# Altium PCB inversor_rev4.PcbDoc
Units mil, origin at the board's own origin, x right, y up, seen from the top; angles counter-clockwise.
Board outline 3939.96 x 3929 mil, 2 copper layers (Top Layer, Bottom Layer); 101 components, 66 nets, 312 pads, 278 vias.
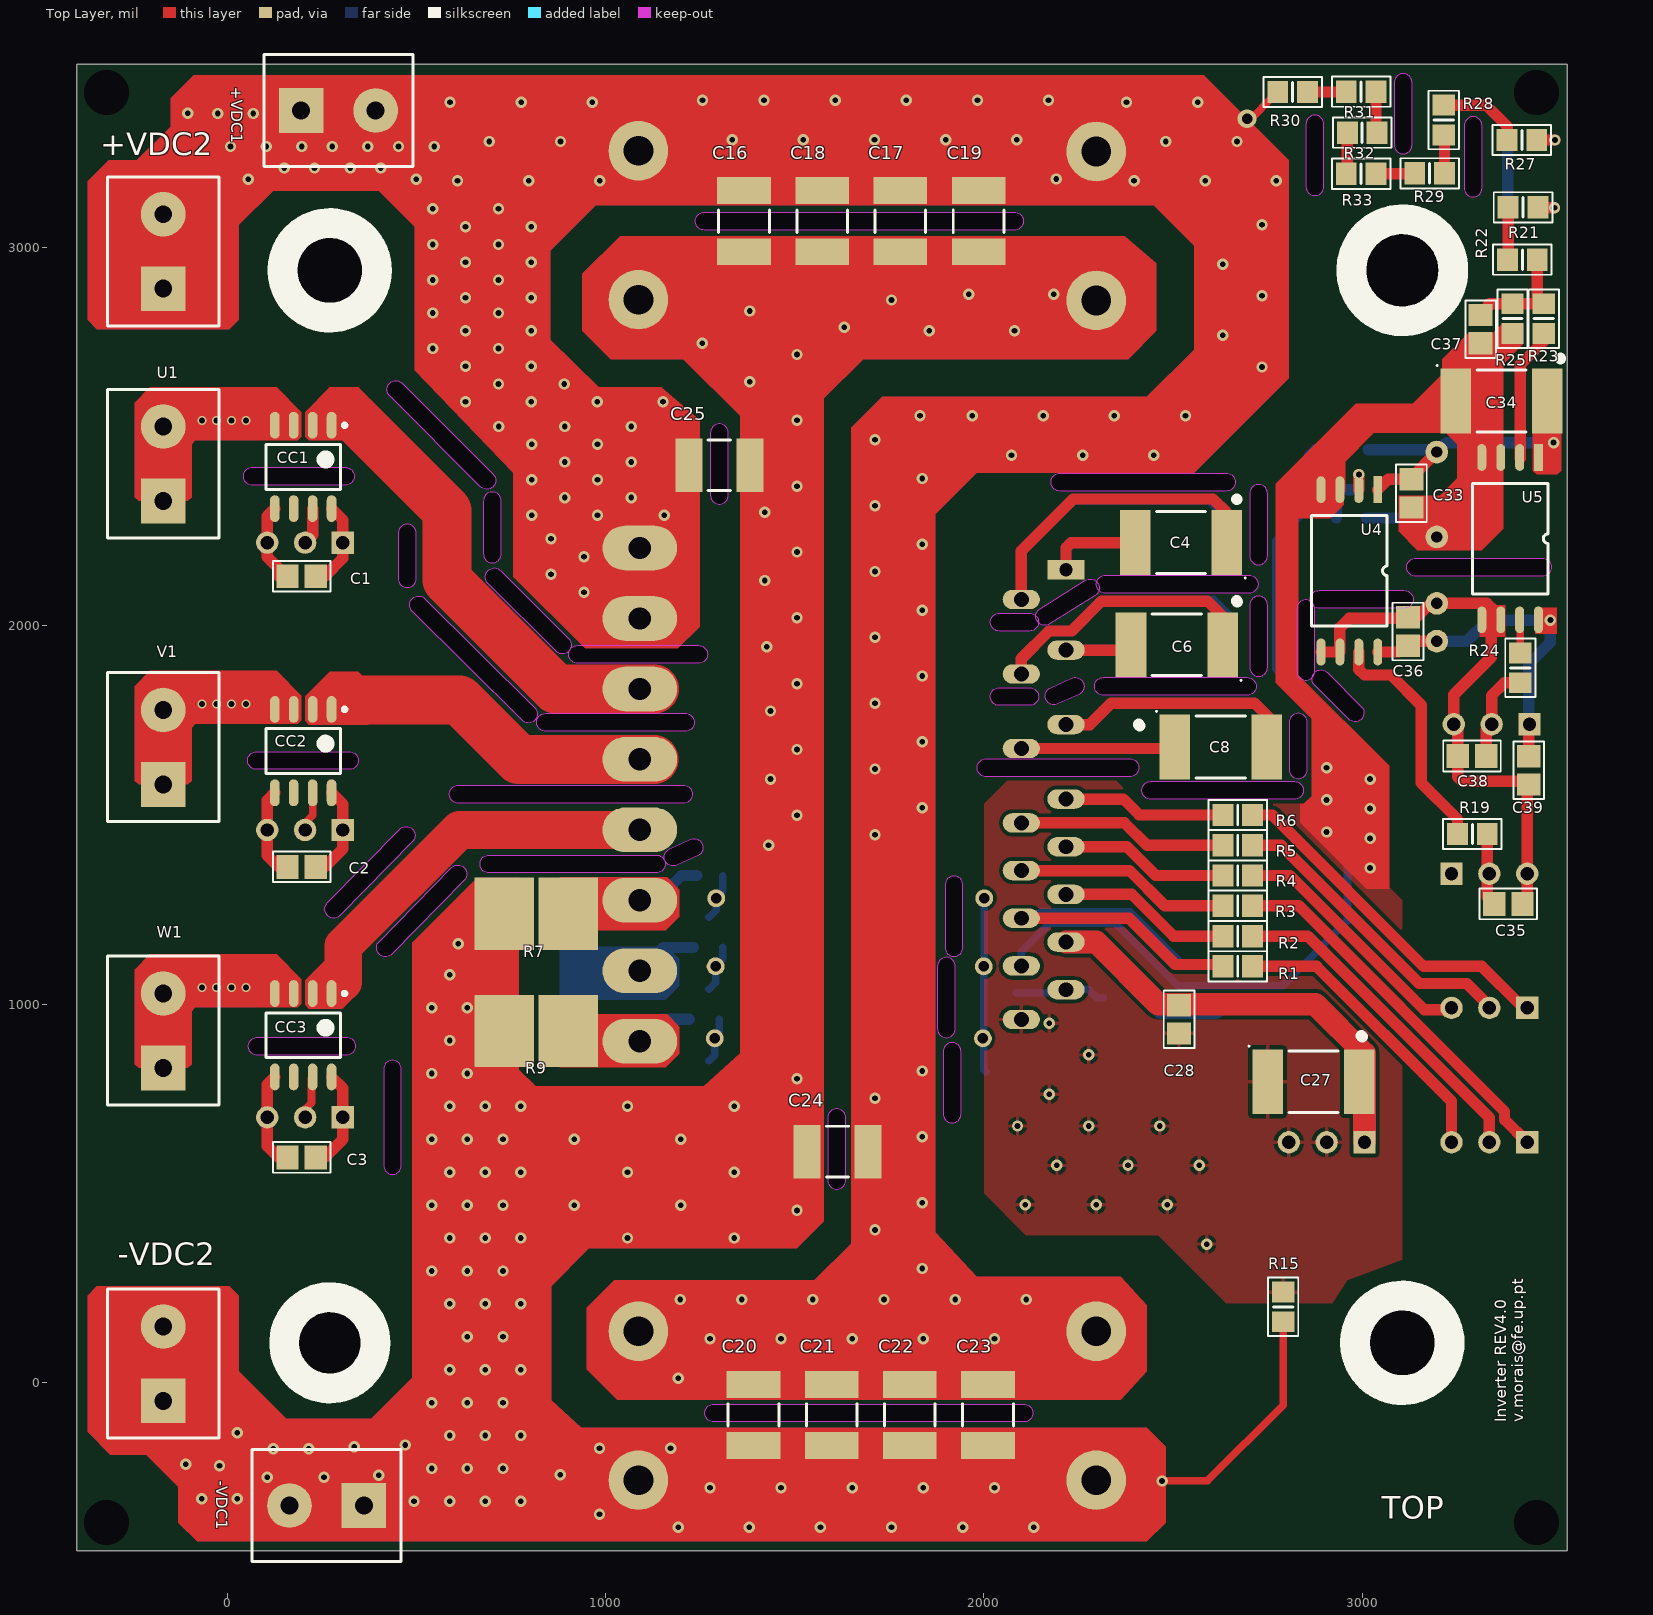
[diagram p0: Top Layer view]
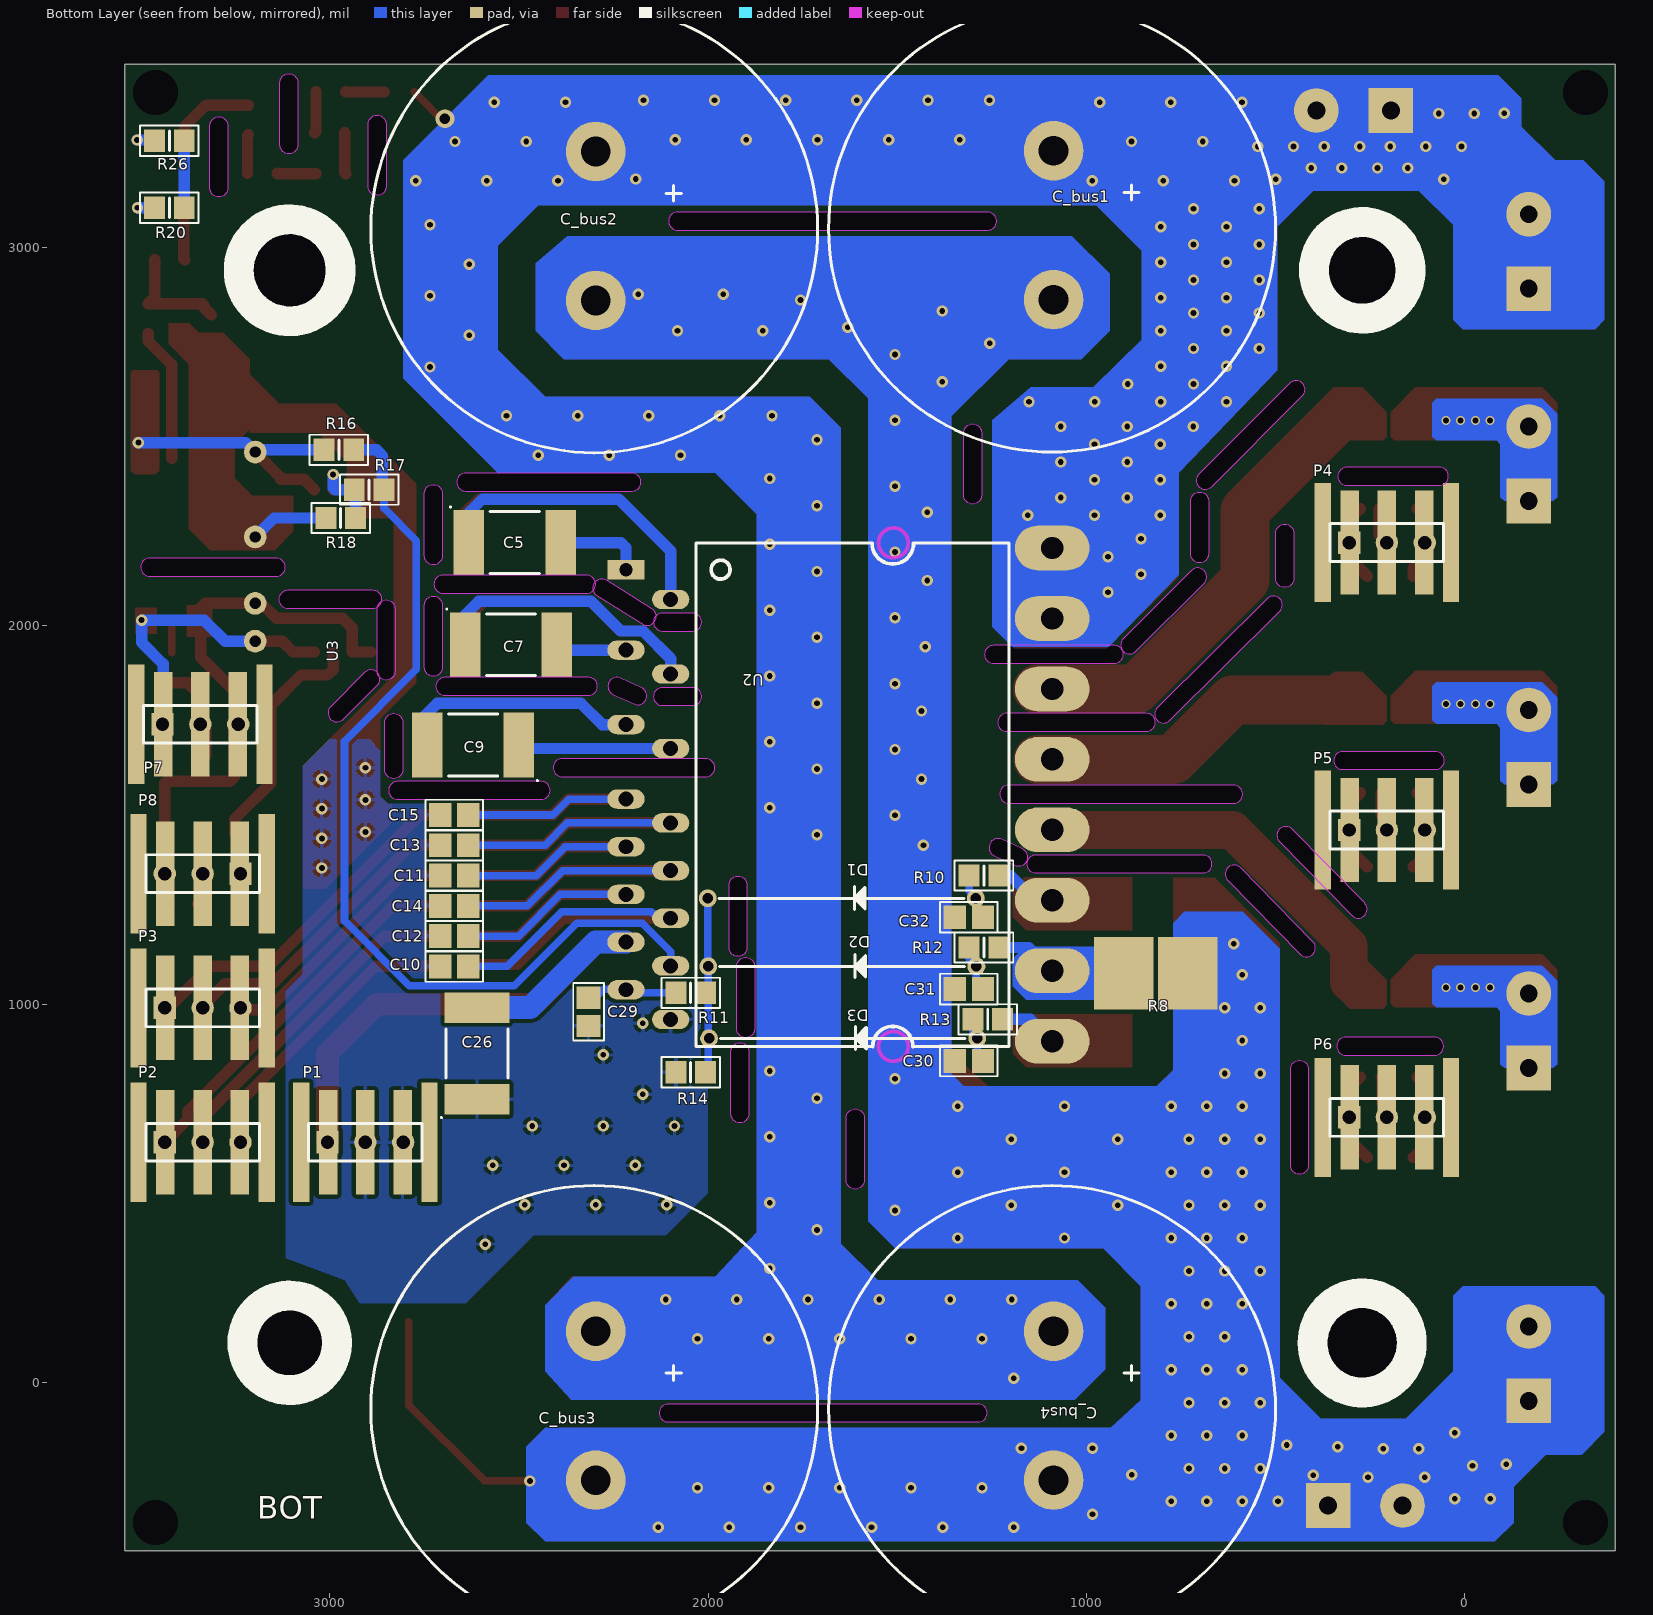
[diagram p1: Bottom Layer view, seen from below]

## Layer stack, top to bottom
Top Solder: solder mask 0.4, Solder Resist, Dk 3.5
Top Layer: signal copper 1.4
Dielectric 1: dielectric 12.6, FR-4, Dk 4.8
Bottom Layer: signal copper 1.4
Bottom Solder: solder mask 0.4, Solder Resist, Dk 3.5

## Board outline
-397.74,-445 3542.22,-445 3542.22,3484 -397.74,3484
cut-out: 2964.29,1753.29 2874.29,1843.29 cw(c2891,1860) 2907.71,1876.71 2997.71,1786.71 cw(c2981,1770) 3004.64,1770 cw(c2981,1770)
cut-out: 2827.36,1880 ccw(c2851,1880) 2874.64,1880 2874.64,2045 ccw(c2851,2045) 2827.36,2045
cut-out: 2886,2046.36 cw(c2886,2070) 2886,2093.64 3111,2093.64 cw(c3111,2070) 3134.64,2070 cw(c3111,2070) 3111,2046.36
cut-out: 3141,2131.36 cw(c3141,2155) 3141,2178.64 3476,2178.64 cw(c3476,2155) 3499.64,2155 cw(c3476,2155) 3476,2131.36
cut-out: 3269.36,3157 ccw(c3293,3157) 3316.64,3157 3316.64,3322 ccw(c3293,3322) 3269.36,3322
cut-out: 3084.36,3271 ccw(c3108,3271) 3131.64,3271 3131.64,3436 ccw(c3108,3436) 3084.36,3436
cut-out: 2851.36,3161 ccw(c2875,3161) 2898.64,3161 2898.64,3326 ccw(c2875,3326) 2851.36,3326
cut-out: 2201,2356.36 cw(c2201,2380) 2201,2403.64 2641,2403.64 cw(c2641,2380) 2664.64,2380 cw(c2641,2380) 2641,2356.36
cut-out: 2702.36,2185 ccw(c2726,2185) 2749.64,2185 2749.64,2350 ccw(c2726,2350) 2702.36,2350
cut-out: 2702.36,1890 ccw(c2726,1890) 2749.64,1890 2749.64,2055 ccw(c2726,2055) 2702.36,2055
cut-out: 2321,2086.36 cw(c2321,2110) 2321,2133.64 2701,2133.64 cw(c2701,2110) 2724.64,2110 cw(c2701,2110) 2701,2086.36
cut-out: 2173.53,2004.96 cw(c2161,2025) 2148.47,2045.04 2268.47,2120.04 cw(c2281,2100) 2304.64,2100 cw(c2281,2100) 2293.53,2079.96
cut-out: 2041,1986.36 cw(c2041,2010) 2041,2033.64 2121,2033.64 cw(c2121,2010) 2144.64,2010 cw(c2121,2010) 2121,1986.36
cut-out: 2041,1789.51 cw(c2041,1813.15) 2041,1836.79 2121,1836.79 cw(c2121,1813.15) 2144.64,1813.15 cw(c2121,1813.15) 2121,1789.51
cut-out: 2195.78,1793.48 cw(c2186,1815) 2176.22,1836.52 2231.22,1861.52 cw(c2241,1840) 2264.64,1840 cw(c2241,1840) 2250.78,1818.48
cut-out: 2316,1816.36 cw(c2316,1840) 2316,1863.64 2696,1863.64 cw(c2696,1840) 2719.64,1840 cw(c2696,1840) 2696,1816.36
cut-out: 2807.36,1620 ccw(c2831,1620) 2854.64,1620 2854.64,1745 ccw(c2831,1745) 2807.36,1745
cut-out: 2441,1541.36 cw(c2441,1565) 2441,1588.64 2821,1588.64 cw(c2821,1565) 2844.64,1565 cw(c2821,1565) 2821,1541.36
cut-out: 2006,1601.36 cw(c2006,1625) 2006,1648.64 2386,1648.64 cw(c2386,1625) 2409.64,1625 cw(c2386,1625) 2386,1601.36
cut-out: 1286,-104.11 cw(c1286,-80.47) 1286,-56.84 2106,-56.84 cw(c2106,-80.47) 2129.64,-80.47 cw(c2106,-80.47) 2106,-104.11
cut-out: 1892.36,710 ccw(c1916,710) 1939.64,710 1939.64,875 ccw(c1916,875) 1892.36,875
cut-out: 1877.36,935 ccw(c1901,935) 1924.64,935 1924.64,1100 ccw(c1901,1100) 1877.36,1100
cut-out: 1897.36,1150 ccw(c1921,1150) 1944.64,1150 1944.64,1315 ccw(c1921,1315) 1897.36,1315
cut-out: 1587.36,535 ccw(c1611,535) 1634.64,535 1634.64,700 ccw(c1611,700) 1587.36,700
cut-out: 1261,3045.89 cw(c1261,3069.53) 1261,3093.16 2081,3093.16 cw(c2081,3069.53) 2104.64,3069.53 cw(c2081,3069.53) 2081,3045.89
cut-out: 1277.36,2345 ccw(c1301,2345) 1324.64,2345 1324.64,2510 ccw(c1301,2510) 1277.36,2510
cut-out: 66.99,2371.68 cw(c66.99,2395.32) 66.99,2418.95 311.99,2418.95 cw(c311.99,2395.32) 335.62,2395.32 cw(c311.99,2395.32) 311.99,2371.68
cut-out: 669.29,2367.81 429.29,2607.81 cw(c446,2624.53) 462.71,2641.24 702.71,2401.24 cw(c686,2384.53) 709.64,2384.53 cw(c686,2384.53)
cut-out: 677.36,2190 ccw(c701,2190) 724.64,2190 724.64,2330 ccw(c701,2330) 677.36,2330
cut-out: 869.29,1932.81 689.29,2112.81 cw(c706,2129.53) 722.71,2146.24 902.71,1966.24 cw(c886,1949.53) 909.64,1949.53 cw(c886,1949.53)
cut-out: 926,1900.89 cw(c926,1924.53) 926,1948.16 1246,1948.16 cw(c1246,1924.53) 1269.64,1924.53 cw(c1246,1924.53) 1246,1900.89
cut-out: 452.36,2125 ccw(c476,2125) 499.64,2125 499.64,2245 ccw(c476,2245) 452.36,2245
cut-out: 779.77,1749.94 489.35,2038.22 cw(c506,2055) 522.65,2071.78 813.08,1783.49 cw(c796.43,1766.72) 820.06,1766.72 cw(c796.43,1766.72)
cut-out: 841.43,1721.36 cw(c841.43,1745) 841.43,1768.64 1211,1768.64 cw(c1211,1745) 1234.64,1745 cw(c1211,1745) 1211,1721.36
cut-out: 78,1620.36 cw(c78,1644) 78,1667.64 323,1667.64 cw(c323,1644) 346.64,1644 cw(c323,1644) 323,1620.36
cut-out: 611,1531.36 cw(c611,1555) 611,1578.64 1206,1578.64 cw(c1206,1555) 1229.64,1555 cw(c1206,1555) 1206,1531.36
cut-out: 691.89,1347 cw(c691.89,1370.64) 691.89,1394.27 1134.11,1394.27 cw(c1134.11,1370.64) 1157.75,1370.64 cw(c1134.11,1370.64) 1134.11,1347
cut-out: 435.5,1132.5 cw(c418.61,1149.04) 401.73,1165.58 592.73,1360.58 cw(c609.61,1344.04) 633.25,1344.04 cw(c609.61,1344.04) 626.5,1327.5
cut-out: 298.89,1234.46 cw(c282,1251) 265.11,1267.54 456.11,1462.54 cw(c473,1446) 496.64,1446 cw(c473,1446) 489.89,1429.46
cut-out: 80,865.36 cw(c80,889) 80,912.64 315,912.64 cw(c315,889) 338.64,889 cw(c315,889) 315,865.36
cut-out: 413.36,574 ccw(c437,574) 460.64,574 460.64,828 ccw(c437,828) 413.36,828
cut-out: 1188.78,1367.48 cw(c1179,1389) 1169.22,1410.52 1224.22,1435.52 cw(c1234,1414) 1257.64,1414 cw(c1234,1414) 1243.78,1392.48

## Design rules (kind name [scope] priority, off if disabled: settings)
Clearance [All] p1: gap=10 ignorepadtopadclearanceinfootprint=FALSE
Height [All] p1: minheight=0 maxheight=10000 prefheight=500
HoleSize [All] p1: absolutevalues=TRUE maxlimit=1000 minlimit=1 maxpercent=80.000 minpercent=20.000
PlaneClearance [All] p1: clearance=100
PolygonConnect [All] p1: connectstyle=Relief reliefconductorwidth=10 reliefentries=4 polygonreliefangle="90 Angle" airgapwidth=10
RoomDefinition inversor_rev4 [InComponentClass('inversor_rev4')] p1: confinementstyle=ConfineIn formatcopy=TRUE lockcomponents=FALSE outline -2036.05,-3776.5 -36.05,-3776.5 -36.05,-2776.5 -2036.05,-2776.5
RoutingVias [All] p1: holewidth=28 width=50 viastyle="Through Hole" minholewidth=28 minwidth=50 maxholewidth=28 maxwidth=50
SilkToSilkClearance [All] p1: silktosilkclearance=1
SilkToSolderMaskClearance [IsPad] p1: minsilkscreentomaskgap=1 clearancetoexposedcopper=TRUE
SolderMaskExpansion [All] p1: expansion=4
Width [All] p1: maxlimit=150 minlimit=10 preferedwidth=30
25 further rules are at their usual default settings.

## Components (designator, comment, footprint, x,y, rotation, side; value= is the part's Value field where it differs from the comment)
+VDC1 "P 2p 5mm" connector1x2_parafuso 294,3362 r0 top
+VDC2 "P 2p 5mm" connector1x2_parafuso -169,2989.53 r90 top
-VDC1 "P 2p 5mm" connector1x2_parafuso 263,-325 r180 top
-VDC2 "P 2p 5mm" connector1x2_parafuso -169,50 r90 top
C1 "C 10uF 0805 MLCC 25V X5R" CAPC_0805 197,2131 r0 top
C2 "C 10uF 0805 MLCC 25V X5R" CAPC_0805 197,1363 r0 top
C3 "C 10uF 0805 MLCC 25V X5R" CAPC_0805 197,595 r0 top
C4 "C 10uF 2917 TANT 50V" CAPC_2917 2521,2220 r180 top
C5 "C 10uF 2917 TANT 50V" CAPC_2917 2511,2220 r180 bottom
C6 "C 10uF 2917 TANT 50V" CAPC_2917 2509.94,1950 r180 top
C7 "C 10uF 2917 TANT 50V" CAPC_2917 2521,1950 r180 bottom
C8 "C 10uF 2917 TANT 50V" CAPC_2917 2626,1680 r0 top
C9 "C 10uF 2917 TANT 50V" CAPC_2917 2621,1685 r0 bottom
C10 "C 1nF 0805 MLCC 50V X7R" CAPC_0805 2671,1100 r180 bottom
C11 "C 1nF 0805 MLCC 50V X7R" CAPC_0805 2671,1340 r180 bottom
C12 "C 1nF 0805 MLCC 50V X7R" CAPC_0805 2671,1180 r180 bottom
C13 "C 1nF 0805 MLCC 50V X7R" CAPC_0805 2671,1420 r180 bottom
C14 "C 1nF 0805 MLCC 50V X7R" CAPC_0805 2671,1260 r180 bottom
C15 "C 1nF 0805 MLCC 50V X7R" CAPC_0805 2671,1500 r180 bottom
C16 "C 100nF MLCC 1812 X7R 1kV" CAPC_1812 1366,3069.53 r90 top
C17 "C 100nF MLCC 1812 X7R 1kV" CAPC_1812 1779.33,3069.53 r90 top
C18 "C 100nF MLCC 1812 X7R 1kV" CAPC_1812 1572.67,3069.53 r90 top
C19 "C 100nF MLCC 1812 X7R 1kV" CAPC_1812 1986,3069.53 r90 top
C20 "C 100nF MLCC 1812 X7R 1kV" CAPC_1812 1391,-85.47 r90 top
C21 "C 100nF MLCC 1812 X7R 1kV" CAPC_1812 1597.67,-85.47 r90 top
C22 "C 100nF MLCC 1812 X7R 1kV" CAPC_1812 1804.33,-85.47 r90 top
C23 "C 100nF MLCC 1812 X7R 1kV" CAPC_1812 2011,-85.47 r90 top
C24 "C 100nF MLCC 1812 X7R 1kV" CAPC_1812 1613,610.53 r0 top
C25 "C 100nF MLCC 1812 X7R 1kV" CAPC_1812 1301,2424.53 r180 top
C26 "C 10uF 2917 TANT 50V" CAPC_2917 2611,870 r90 bottom
C27 "C 10uF 2917 TANT 50V" CAPC_2917 2871,795 r0 top
C28 "C 10uF 0805 MLCC 25V X5R" CAPC_0805 2516,960 r90 top
C29 "C 10nF 0805 MLCC 50V X7R" CAPC_0805 2316,980 r90 bottom
C30 "C 10nF 0805 MLCC 50V X7R" CAPC_0805 1311,850 r180 bottom
C31 "C 10nF 0805 MLCC 50V X7R" CAPC_0805 1311,1040 r180 bottom
C32 "C 10nF 0805 MLCC 50V X7R" CAPC_0805 1311,1230 r180 bottom
C33 "C 10uF 0805 MLCC 25V X5R" CAPC_0805 3130,2350 r90 top
C34 "C 10uF 2917 TANT 50V" CAPC_2917 3368,2594 r0 top
C35 "C1uF 0805 MLCC 50V X5R" CAPC_0805 3386,1265 r180 top
C36 "C 10uF 0805 MLCC 25V X5R" CAPC_0805 3121,1985 r270 top
C37 "C1uF 0805 MLCC 50V X5R" CAPC_0805 3313,2784 r90 top
C38 "C1uF 0805 MLCC 50V X5R" CAPC_0805 3290,1656 r0 top
C39 "C 10uF 0805 MLCC 25V X5R" CAPC_0805 3440,1618 r90 top
C_bus1 "C 470uF EleCap TH 450V" Capacitor_DCBUS 881,2850 r90 bottom
C_bus2 "C 470uF EleCap TH 450V" Capacitor_DCBUS 2091,2848 r90 bottom
C_bus3 "C 470uF EleCap TH 450V" Capacitor_DCBUS 2091,-270 r90 bottom
C_bus4 "C 470uF EleCap TH 450V" Capacitor_DCBUS 881,-270 r90 bottom
CC1 "IC CC 30A SO-8" CC6303_SOP8 201,2420 r270 top
CC2 "IC CC 30A SO-8" CC6303_SOP8 201,1669 r270 top
CC3 "IC CC 30A SO-8" CC6303_SOP8 201,918 r270 top
D1 "IC DIO generic" Diode_th 1292.34,1280 r0 bottom
D2 "IC DIO generic" Diode_th 1291,1100 r0 bottom
D3 "IC DIO generic" Diode_th 1288.87,909.78 r0 bottom
P1 "P 8p 2.54 SR DW 3P" MOLEX_3p_105431_1103 2906,635 r180 bottom
P2 "P 8p 2.54 SR DW 3P" MOLEX_3p_105431_1103 3336,635 r180 bottom
P3 "P 8p 2.54 SR DW 3P" MOLEX_3p_105431_1103 3336,990.41 r180 bottom
P4 "P 8p 2.54 SR DW 3P" MOLEX_3p_105431_1103 206,2220 r180 bottom
P5 "P 8p 2.54 SR DW 3P" MOLEX_3p_105431_1103 206,1460.5 r180 bottom
P6 "P 8p 2.54 SR DW 3P" MOLEX_3p_105431_1103 206,701 r180 bottom
P7 "P 8p 2.54 SR DW 3P" MOLEX_3p_105431_1103 3342,1740 r180 bottom
P8 "P 8p 2.54 SR DW 3P" MOLEX_3p_105431_1103 3336,1345 r0 bottom
R1 "R 100 1/8W 0805 1%" RESC_0805 2671,1100 r0 top
R2 "R 100 1/8W 0805 1%" RESC_0805 2671,1180 r0 top
R3 "R 100 1/8W 0805 1%" RESC_0805 2671,1260 r0 top
R4 "R 100 1/8W 0805 1%" RESC_0805 2671,1340 r0 top
R5 "R 100 1/8W 0805 1%" RESC_0805 2671,1420 r0 top
R6 "R 100 1/8W 0805 1%" RESC_0805 2671,1500 r0 top
R7 "R 0040 10W 7146 1%" RESC7247X15N 817,1239 r180 top
R8 "R 0040 10W 7146 1%" RESC7247X15N 817,1082 r180 bottom
R9 "R 0040 10W 7146 1%" RESC7247X15N 817,929 r180 top
R10 "R 100 1/8W 0805 1%" RESC_0805 1271,1340 r0 bottom
R11 "R 1k8 1/8W 0805 1%" RESC_0805 2046,1030 r0 bottom
R12 "R 100 1/8W 0805 1%" RESC_0805 1271,1150 r0 bottom
R13 "R 100 1/8W 0805 1%" RESC_0805 1261,960 r0 bottom
R14 "R 3K 1/8W 0805 1%" RESC_0805 2046,820 r180 bottom
R15 "R 0 1/8W 0805" RESC_0805 2791,200 r270 top
R16 "R 3k6 1/8W 0805 1%" RESC_0805 2976,2465 r180 bottom
R17 "R 49k9 1/8W 0805 1%" RESC_0805 2896,2360 r0 bottom
R18 "R 49k9 1/8W 0805 1%" RESC_0805 2971,2285 r180 bottom
R19 "R 330 1/8 0805 1%" RESC_0805 3291,1450 r0 top
R20 "R 30k 1/8W 0805 1%" RESC_0805 3424,3105 r0 bottom
R21 "R 30k 1/8W 0805 1%" RESC_0805 3425,3106 r180 top
R22 "R 30k 1/8W 0805 1%" RESC_0805 3423,2968 r0 top
R23 "R 30k 1/8W 0805 1%" RESC_0805 3480,2812 r270 top
R24 "R 330 1/8 0805 1%" RESC_0805 3418,1889 r270 top
R25 "R 150R 1/8W 0805 1%" RESC_0805 3397,2812 r90 top
R26 "R 30k 1/8W 0805 1%" RESC_0805 3424,3282 r0 bottom
R27 "R 30k 1/8W 0805 1%" RESC_0805 3422,3284 r180 top
R28 "R 30k 1/8W 0805 1%" RESC_0805 3215.4,3336.9 r270 top
R29 "R 30k 1/8W 0805 1%" RESC_0805 3178,3196 r180 top
R30 "R 30k 1/8W 0805 1%" RESC_0805 2816,3411 r0 top
R31 "R 30k 1/8W 0805 1%" RESC_0805 2997,3412 r0 top
R32 "R 30k 1/8W 0805 1%" RESC_0805 3000,3303.5 r180 top
R33 "R 30k 1/8W 0805 1%" RESC_0805 2997,3195 r0 top
U1 "P 2p 5mm" connector1x2_parafuso -169,2428.43 r90 top
U2 "IC IGBT IPM  IKCM30F60GA" ikcm30f60ga 2216.99,2148.44 r180 bottom
U3 "IC CC/CC 1W 5V" DC/DC_ISO 3197,1959.41 r90 bottom
U4 "IC AmpIso UNI AMC1311" "AMC1311 - SOIC8" 3041,2360 r270 top
U5 "IC AmpIso UNI AMC1311" "AMC1311 - SOIC8" 3466,2445 r270 top
V1 "P 2p 5mm" connector1x2_parafuso -169,1679.21 r90 top
W1 "P 2p 5mm" connector1x2_parafuso -169,930 r90 top

## Footprints (in the part's own frame and the unit in brackets; to place one, negate y for a bottom-side part, rotate by r counter-clockwise, add the part's x,y. Pads: shape width x height; smd on the part's side, far side on the other; paste and mask are expansions set on the pad)
"AMC1311 - SOIC8" [mm]
  rect 1.8x0.6 smd: 1(0,0)
  oval 1.8x0.6 smd: 2(0,-1.27) 3(0,-2.54) 4(0,-3.81) 5(10.9,-3.81) 6(10.9,-2.54) 7(10.9,-1.27) 8(10.9,0)
  silkscreen extent 1.73,-4.44 9.17,0.64, body extent 1.7,-4.52 9.22,0.69, height 3
Capacitor_DCBUS [mm]
  round 4 hole 2: 1(0.305,5.232) 2(10.305,5.232)
  silkscreen extent -9.92,-9.67 20.08,20.33, body extent -9.67,-9.92 20.33,20.08, height 41
CAPC_0805 [mm] "Chip Capacitor, Body 2.0x1.3mm, IPC Low Density"
  rect 1.5x1.6 smd: 1(-0.95,0) 2(0.95,0)
  silkscreen extent -1.93,-1.03 1.93,1.03, body extent -1.1,-0.72 1.1,0.72, height 1.1
CAPC_1812 [mm] "Chip Capacitor, 2-Leads, Body 4,50x3,20mm, IPC Low Density"
  rect 1.8x3.6 smd: 1(-2.05,0) 2(2.05,0)
  silkscreen extent -0.75,-1.7 0.75,1.7, body extent -2.4,-1.75 2.4,1.75, height 2.6
CAPC_2917 [mm] "Chip Capacitor, 2-Leads, Body 7,30x4,20mm, IPC Medium Density"
  rect 2.05x4.35 smd: 1(-3.075,0) 2(3.075,0)
  silkscreen extent -4.36,-2.07 1.65,2.44, body extent -3.75,-2.15 3.75,2.15, height 4
CC6303_SOP8 [mm] "SOP, 8-Leads, Body 4,90x3,91mm, Pitch 1,27mm, IPC Medium Density"
  oval 1.8x0.65 smd: 1(-2.8,1.905) 2(-2.8,0.635) 3(-2.8,-0.635) 4(-2.8,-1.905) 5(2.8,-1.905) 6(2.8,-0.635) 7(2.8,0.635) 8(2.8,1.905)
  silkscreen extent -2.92,-2.5 1.5,2.91, body extent -1.9,-2.5 1.9,2.5, height 2.65
connector1x2_parafuso [mm] "Connector; Header; 2 Position"
  rect 3x3 hole 1.2: 1(-2.5,0)
  round 3 hole 1.2: 2(2.5,0)
  silkscreen extent -5,-3.75 5,3.75, body extent -4.92,-4.53 5.68,4.47, height 14.6
DC/DC_ISO [mil]
  round 60 hole 30: 1(0,0) 2(100,0) 3(275.59,0) 4(500,0)
  body extent -54,-149 572,80, height 315
Diode_th [mm]
  round 1.2 hole 0.7: 1(0,0) 2(18,0)
  silkscreen extent 0.81,-0.79 17.25,0.76, body extent -0.93,-0.75 19.07,0.77, height 1.76
ikcm30f60ga [mm]
  rect 2.5x1.3 hole 0.9: 1(0,0)
  oval 2.5x1.3 hole 1: 2(2.997,-2) 3(0,-5.4) 4(2.997,-7) 5(0,-10.4) 6(2.997,-12) 7(0,-15.4) 8(2.997,-17) 9(0,-18.6) 10(2.997,-20.2) 11(0,-21.8) 12(2.997,-23.4) 13(0,-25) 14(2.997,-26.6) 15(0,-28.2) 16(2.997,-30.2)
  oval 5x3 hole 1.5: 17(28.611,-31.655) 18(28.611,-26.925) 19(28.611,-22.195) 20(28.611,-17.465) 21(28.611,-12.735) 22(28.611,-8.005) 23(28.611,-3.275) 24(28.611,1.455)
  Top Layer keep-out circle w0.254: c17.95,1.8 r1
  Top Layer keep-out circle w0.254: c17.95,-32 r1
  silkscreen extent 4.7,-32 25.7,1.78, body extent -0.67,-33.2 29.16,3.1, height 1.3
MOLEX_3p_105431_1103 [mm] "conector 3p 2.5mm"
  rect 1.1x8 smd: 0(-4.305,0) 0(4.305,0)
  rect 1.5x1.5 hole 0.9: 1(-2.54,0)
  rect 1.24x7 smd: 1(-2.5,0) 2(0,0) 3(2.5,0)
  round 1.5 hole 0.9: 2(0,0) 3(2.54,0)
  silkscreen extent -3.81,-1.27 3.81,1.27, body extent -5.37,-4.14 5.36,4.11, height 11.3
RESC7247X15N [mm] "Chip Resistor, 2-Leads, Body 7,22x4,72mm, IPC Medium Density"
  rect 4x4.85 smd: 1(-2.159,0) 2(2.159,0)
  body extent -3.67,-2.42 3.67,2.42, height 1.5
RESC_0805 [mm] "Chip Resistor, Body 2.0x1.3mm, IPC Low Density"
  rect 1.4x1.5 smd: 1(-1,0) 2(1,0)
  silkscreen extent -1.96,-1.01 1.96,1.01, body extent -1.07,-0.7 1.08,0.7, height 0.65

## Part data
+VDC1 +VDC2 -VDC1 -VDC2 U1 V1 W1: library part gen_purpose_conn_1x2, "Bloques de terminales de PCB de perfil estándar RS de 5,0 mm", Price=0,24, RS VPN=896-6696
C1 C2 C3 C28 C33 C36 C39: library part "Capacitor SMD", "Capacitores de cerâmica multicamada MLCC - SMD/SMT 10uF 25V X5R +/-10% 0805 Gen Purp", LCSC PART #=C15850, Mouser VPN=963-TMK212BBJ106KG-T, Price=0,162
C4 C5 C6 C7 C8 C9 C26 C27 C34: library part tantalum_CAP, "Condensadores de tântalo - revestimento sólido de SMD 50V 10uF 10% ESR=0.8Ohms", LCSC PART #=C89596, Mouser VPN=80-T491D106K050AT, Price=1,58
C10 C11 C12 C13 C14 C15: library part "Capacitor SMD", "Capacitores de cerâmica multicamada MLCC - SMD/SMT WCAP-CSGP 1000pF 0805 10% 50V MLCC", LCSC PART #=C46653, Mouser VPN=710-885012207086, Price=0,08
C16 C17 C18 C19 C20 C21 C22 C23 C24 C25: library part CAPACITOR_dcbus, "Capacitores de cerâmica multicamada MLCC - SMD/SMT 1000V 0.1uF X7R 1812 10% AEC-Q200", Mouser VPN=80-C1812C104KDRAUTO, Price=0,747
C29 C30 C31 C32: library part "Capacitor SMD", "Capacitores de cerâmica multicamada MLCC - SMD/SMT 10nF 50V X7R 10%", LCSC PART #=C1710, Mouser VPN=603-CC805KRX7R9BB103, Price=0,099
C35 C37 C38: library part "Capacitor SMD", "Capacitores de cerâmica multicamada MLCC - SMD/SMT 0805 50V 1uF 20% X5R", LCSC PART #=C28323, Mouser VPN=963-UMK212BJ105MG-T, Price=0,153
C_bus1 C_bus2 C_bus3 C_bus4: library part CAPACITOR_dcbus, "Capacitores eletrolíticos de alumínio - terminal de pressão 450V 470uF 20% Tol.", Mouser VPN=661-ESMR451N471MR40S, Price=6,28
CC1 CC2 CC3: library part Current_Sensor_cc6303, "Sensores de Corrente de Montagem de Painel Hall Effect IC LF 30A 66 mV/A", LCSC PART #=C163283, Mouser VPN=630-ACHS-7123-000E, Price=3,47
D1 D2 D3: library part Diode, "Diodos - Fins gerais, energia, comutação Hi Conductance Fast", Mouser VPN=512-1N4148TR, Price=0,09
P1 P2 P3 P4 P5 P6 P7 P8: library part "Header 3", "Distribuidores e Alojamento de Fios CGrid Hrd SRDW THo le 8ckt", Mouser VPN=538-87937-0800, Price=0,621
R1 R2 R3 R4 R5 R6 R10 R12 R13: library part Resistor, "Resistores de Filme Espesso - SMD 1/8Watt 100ohms 1% Commercial Use", LCSC PART #=C17408, Mouser VPN=71-CRCW0805100RFKEAC, Price=0,09
R7 R8 R9: library part Resistor, "MCLRP12FTWRR039 -  SMD Current Sense Resistor, 0.039 ohm, LRP Series, 2512 [6432 Metric], 3 W, ± 1%, Metal Strip", Mouser VPN=71-WSHP2818R0400FEA, Price=1,57
R11: library part Resistor, "Resistores de Filme Espesso - SMD ResA-AS 0805 1k8 1% 125mW TC100", LCSC PART #=C17398, Mouser VPN=652-CR0805AFX1801EAS, Price=0,09
R14: library part Resistor, "Resistores de Filme Espesso - SMD 1/8watt 3Kohms 1% 100ppm", LCSC PART #=C17661, Mouser VPN=71-CRCW0805-3K-E3, Price=0,09
R15: library part Resistor, "Resistores de Filme Espesso - SMD 1/8Watt 0ohms Commercial Use", LCSC PART #=C17477, Mouser VPN=71-CRCW08050000Z0EAC, Price=0,09
R16: library part Resistor, "Resistores de Filme Espesso - SMD 1/8watt 3.6Kohms 1%", LCSC PART #=C18359, Mouser VPN=71-CRCW08053K60FKEA, Price=0,09
R17 R18: library part Resistor, "Resistores de Filme Espesso - SMD 1/8Watt 49.9Kohms 1% Commercial Use", LCSC PART #=C17719, Mouser VPN=71-CRCW080549K9FKEAC, Price=0,09
R19 R24: library part Resistor, "Resistores de Filme Espesso - SMD 1/8Watt 330ohms 1% Commercial Use", LCSC PART #=C17630, Mouser VPN=71-CRCW0805330RFKEAC, Price=0,09
R20 R21 R22 R23 R26 R27 R28 R29 R30 R31 R32 R33: library part Resistor, "Resistores de Filme Espesso - SMD 0805 30Kohms 1% AEC-Q200", LCSC PART #=C17621, Mouser VPN=667-ERJ-6ENF3002V, Price=0,09
R25: library part Resistor, "Resistores de Filme Espesso - SMD 1/8watt 150ohms 1% 100ppm", LCSC PART #=C17471, Mouser VPN=71-CRCW0805-150-E3, Price=0,09
U2: library part IKCM30F60GA, "Controladores e drivers de Motor/Movimento/Ignição IFPS MODULES", Mouser VPN=726-IKCM30F60GDXKMA1, Price=16,25
U3: library part DC/DC_ISO, "Conversores CC/CC com isolação 1W 5Vin 5Vout 200mA SIP7", Mouser VPN=919-RFB-0505S, Price=1,4
U4 U5: library part AMC1311, "Amplificadores de isolamento A 595-AMC1311DWV", Mouser VPN=595-AMC1311DWVR, Price=5,55

## Free pads (board coordinates)
  round 60 hole 118.11 unplated: 4(-319,-370) 4(-319,3409.53) 4(3460.53,3409.53) 4(3460.53,-370)
  round 78.74 hole 196.85: 5(271.35,105) 6(3106,105) 7(3106,2939.65) 8(271.35,2939.65)

## Via types
v1: diameter 30, hole 15, Top Layer to Bottom Layer, 253 vias
v2: diameter 30, hole 15.75, Top Layer to Bottom Layer, 12 vias
v3: diameter 23.62, hole 15.75, Top Layer to Bottom Layer, 12 vias
v4: diameter 50, hole 28, Top Layer to Bottom Layer, 1 vias

## Nets (pads, with @x,y where several pads share a name; then routed paths per layer and width w, separated by ;. In a path a pad name is that pad's centre, name@x,y a point inside that pad or via, vN(x,y) a via of type N, cw(c..) or ccw(c..) an arc to the next point about the centre after c; other vN are vias at no path point)
5gnd1: C1.1 CC1.5 P4.3 | length 199.5
  Top Layer w30: CC1.5 106,2289.76 106,2220 106,2182 135.98,2152.02 C1.1@135.98,2131
5gnd2: C2.1 CC2.5 P5.3 | length 216.5
  Top Layer w30: CC2.5 106,1538.76 106,1460.5 106,1392.98 C2.1@135.98,1363
5gnd3: C3.1 CC3.5 P6.3 | length 233.5
  Top Layer w30: CC3.5 106,787.76 106,701 106,624.98 C3.1@135.98,595
5gnd4: C35.1 C36.1 C38.1 C39.1 P7.3 P8.3 U3.2 U4.5 U4.6 U5.5 U5.6 | length 1554.1
  Top Layer w30: U4.5 U4.6 2941,1995 2966,2020 3141,2020 3180.41,2059.41 U3.2 3329.59,2059.41 3342,2047 3342,2012 3341,2011 3341,1917 3242,1818 3242,1740 3252.6,1729.4 C38.1 3252.6,1600.4 3264,1589 3431.6,1589 3436,1584.6 3436,1345 3436,1277.6 C35.1
5VDC1: C1.2 CC1.8 P4.1 | length 211.1
  Top Layer w30: C1.2@258.02,2131 306,2178.98 306,2220 306,2279.76 CC1.8
5VDC2: C2.2 CC2.8 P5.1 | length 228.1
  Top Layer w30: C2.2@258.02,1363 306,1410.98 306,1460.5 306,1528.76 CC2.8
5VDC3: C3.2 CC3.8 P6.1 | length 245.1
  Top Layer w30: C3.2@258.02,595 306,642.98 306,701 306,777.76 CC3.8
5Vdc4: C36.2 C39.2 P7.1 U3.1 U4.8 U5.8 | length 874.7
  Top Layer w30: U4.8 3096.87,1930.87 3125.41,1959.41 U3.1 ; C39.2 3440,1738 P7.1@3442,1740
  Bottom Layer w30: U3.1 3276.41,1959.41 3332,2015 v2(3497,2015) 3497,1956 3440.43,1899.43 P7.1@3440.43,1740
15VCC: C26.2 C27.2 C28.2 P1.1 U2.13 | length 1611.6
  Top Layer w60: U2.13 2296.81,1164.19 2461,1000 2876,1000 3006,870 P1.1@3006,635
  Bottom Layer w60: U2.13 2296.81,1164.19 2469.94,991.06 C26.2
+VDCBUS: +VDC1.1 +VDC1.2 +VDC2.1 +VDC2.2 C16.2 C17.2 C18.2 C19.2 C20.2 C21.2 C22.2 C23.2 C24.2 C25.2 C_bus1.2 C_bus2.2 C_bus3.2 C_bus4.2 R30.1 U2.23 | length 145.5
  Top Layer w20: v4(2695.84,3340.16) 2686,3330.31 2686,3325 2690.63,3325 R30.1
  other v1: 1192,11.7 1276,115.7 1464,115.7 1652,115.7 1840,115.7 2028,115.7 1197.49,219.7 1360,219.7 1548,219.7 1736,219.7 1924,219.7 2112,219.7 1837.45,301.46 1712.45,403.46 1837.45,475.46 1837.45,649.46 1712.45,751.46 1837.45,823.46 1712.45,1447.46 1837.45,1519.46 1712.45,1621.46 1837.45,1693.46 1712.45,1795.46 1837.45,1867.46 1712.45,1969.46 1837.45,2041.46 943,2089 856,2136 1712.45,2143.46 943,2183 1837.45,2215.46 856,2230 805,2292 979,2292 1155,2292 1712.45,2317.46 892,2339 1068,2339 805,2386 979,2386 1837.45,2389.46 892,2433 1068,2433 2073,2451 2261,2451 2449,2451 805,2480 979,2480 1712.45,2491.46 718,2527 892,2527 1068,2527 1831,2555 1969,2555 2157,2555 2345,2555 2533,2555 630,2592 804,2592 978,2592 1152,2592 717,2639 891,2639 2735,2684 630,2686 804,2686 543,2733 717,2733 2631,2768 630,2780 804,2780 543,2827 717,2827 630,2867 804,2867 2735,2872 543,2914 717,2914 2631,2956 630,2961 804,2961 543,3008 717,3008 630,3055 804,3055 2735,3060 543,3102 717,3102 609,3176 797,3176 985,3176 2397,3176 2585,3176 2773,3176 56,3180 500,3180 2191,3181 151,3210 231,3210 325,3210 406,3210 9,3267 103,3267 197,3267 278,3267 372,3267 453,3267 547,3267 693,3280 881,3280 2481,3280 2669,3280 1335,3285 1523,3285 1711,3285 1899,3285 2087,3285 -25,3354 69,3354 -104,3354.53 589,3384 777,3384 965,3384 2377,3384 2565,3384 1256.49,3389 1419,3389 1607,3389 1795,3389 1983,3389 2171,3389
-VDCBUS: -VDC1.1 -VDC1.2 -VDC2.1 -VDC2.2 C16.1 C17.1 C18.1 C19.1 C20.1 C21.1 C22.1 C23.1 C24.1 C25.1 C30.1 C31.1 C32.1 C_bus1.1 C_bus2.1 C_bus3.1 C_bus4.1 R7.2 R8.2 R9.2 R15.2 | length 623.5
  Top Layer w20: v1(2471,-260) 2591,-260 2791,-60 R15.2
  other v1: 1192,-382 1380,-382 1568,-382 1756,-382 1944,-382 2132,-382 984,-348 494,-314 588,-314 682,-314 776,-314 -67,-307 27,-307 1276,-278 1464,-278 1652,-278 1840,-278 2028,-278 106,-250 256,-250 401,-245 880,-244 541,-227 635,-227 729,-227 -20,-220 -109,-215.47 122,-175 216,-175 984,-174 1172,-174 336,-170 471,-165 588,-140 682,-140 776,-140 27,-133 541,-53 635,-53 729,-53 588,34 682,34 776,34 635,121 729,121 588,208 682,208 776,208 541,295 635,295 729,295 588,382 682,382 776,382 1058,382 1340,382 1506,455 541,469 635,469 729,469 917,469 1199,469 588,556 682,556 776,556 1058,556 1340,556 541,643 635,643 729,643 917,643 1199,643 588,730 682,730 776,730 1058,730 1340,730 1506,803 541,817 635,817 588,904 541,991 635,991 588,1078 610.5,1160 1431,1420 1506,1499 1436,1595 1506,1673 1436,1775 1506,1847 1426.5,1945 1506,2021 1421,2120 1506,2195 1421,2300 1506,2369 1506,2543 1381,2645 1506,2717 1256,2747 1856,2780 2081,2780 1631,2789 1381,2832 1756,2861 1960,2876 2185,2876
Gnd1: C10.1 C11.1 C12.1 C13.1 C14.1 C15.1 C26.1 C27.1 C28.1 C29.1 C33.1 C34.1 C37.1 P1.2 P1.3 R14.1 R15.1 R18.1 R25.1 U2.16 U3.3 U4.3 U4.4 U5.3 U5.4 | length 412.3
  Top Layer w30: U4.4 U4.3 2941,2490 2916,2490
  Bottom Layer w30: R18.1 3147,2285 U3.3
  other v1: 2589,366 2109,470 2297,470 2485,470 2193,574 2381,574 2569,574 2089,678 2277,678 2465,678 2173,762 2277,866 2173,950
  other v2: 3021,1360 3021,1438.33 2906,1455 3021,1516.67 2906,1540 3021,1595 2906,1625
I_U: CC1.7 P4.2 | length 98
  Top Layer w30: P4.2@206,2220 226,2240 CC1.7
I_V: CC2.7 P5.2 | length 106.5
  Top Layer w20: P5.2@206,1460.5 206,1479 226,1499 CC2.7
I_W: CC3.7 P6.2 | length 115
  Top Layer w20: P6.2@206,701 206,723 223,740 223,804.76 CC3.7
IN_UH: C15.2 R6.1 U2.7 | length 866.2
  Top Layer w30: U2.7 2368.86,1542.14 2411,1500 R6.1
  Bottom Layer w20: U2.7 2368.86,1542.14 2411,1500 C15.2
IN_UL: C14.2 R3.1 U2.10 | length 1144.4
  Top Layer w30: U2.10 2384.7,1353.17 2477.86,1260 R3.1
  Bottom Layer w20: U2.10 2384.7,1353.17 2477.86,1260 C14.2
IN_VH: C13.2 R5.1 U2.8 | length 1129.7
  Top Layer w30: U2.8 2371.85,1479.15 2431,1420 2631,1420 R5.1@2641,1410
  Bottom Layer w20: U2.8 2371.85,1479.15 2431,1420 C13.2
IN_VL: C12.2 R2.1 U2.11 | length 922.5
  Top Layer w30: U2.11 2391.12,1290.17 2501.29,1180 R2.1
  Bottom Layer w20: U2.11 2390.83,1290.17 2501,1180 C12.2
IN_WH: C11.2 R4.1 U2.9 | length 894.3
  Top Layer w30: U2.9 2378.27,1416.16 2454.43,1340 R4.1
  Bottom Layer w20: U2.9 2378.27,1416.16 2454.43,1340 C11.2
IN_WL: C10.2 R1.1 U2.12 | length 1186.7
  Top Layer w30: U2.12 2383.82,1227.18 2506,1105 2626.63,1105 R1.1
  Bottom Layer w20: U2.12 2133.18,1227.18 2150.19,1244.19 2386.81,1244.19 2531,1100 C10.2
iTRIP: C29.2 R11.2 U2.15 | length 244.1
  Bottom Layer w20: R11.2 2208.79,1030 U2.15 2218.79,1040 2276,1040 2298.6,1017.4 C29.2
NetC4_1: C4.1 C5.1 U2.2 | length 1698.2
  Top Layer w30: U2.2 2099,2198 2236.32,2335.32 2605.69,2335.32 2642.06,2298.94 C4.1 C4.1@2642.06,2156.06
  Bottom Layer w30: U2.2 2099,2198 2236,2335 2596,2335 2632.06,2298.94 C5.1
NetC4_2: C4.2 C5.2 U2.1 | length 482.6
  Top Layer w30: U2.1 2216.99,2205.99 2231,2220 C4.2
  Bottom Layer w30: U2.1 2216.99,2205.99 2231,2220 C5.2
NetC6_1: C6.1 C7.1 U2.4 | length 1467.2
  Top Layer w30: U2.4 2099,1913.02 2172.41,1986.43 2232.43,1986.43 2311.32,2065.32 2591,2065.32 2631,2025.32 C6.1
  Bottom Layer w30: U2.4 2099,1913.02 2172.41,1986.43 2231,1986.43 2309.57,2065 2606,2065 2642.06,2028.94 C7.1
NetC6_2: C6.2 C7.2 U2.3 | length 370.8
  Top Layer w30: U2.3 2374.72,1935.84 C6.2
  Bottom Layer w30: U2.3 C7.2@2410.09,1935.84
NetC8_1: C8.1 C9.1 U2.6 | length 852.5
  Top Layer w30: U2.6 C8.1@2515,1676 ; C8.1@2521,1670 C8.1@2515,1676 ; C8.1@2521,1676 C8.1@2515,1676
  Bottom Layer w30: U2.6 C9.1@2521,1676
NetC8_2: C8.2 C9.2 U2.5 | length 1343.8
  Top Layer w30: U2.5 2279.99,1738.99 2336.32,1795.32 2714.51,1795.32 2715.1,1795.9 2763.13,1747.87 C8.2@2763.13,1670
  Bottom Layer w30: U2.5 2279.99,1738.99 2336,1795 2716,1795 2762.06,1748.94 C9.2@2762.06,1660
NetC30_2: C30.2 D3.1 R13.2 | length 121.1
  Bottom Layer w20: C30.2 1288.87,865.28 D3.1 1300.37,921.28 R13.2
NetC31_2: C31.2 D2.1 R12.2 | length 125.2
  Bottom Layer w20: C31.2 1291,1057.4 D2.1 1310.37,1119.37 R12.2
NetC32_2: C32.2 D1.1 R10.2 | length 125.2
  Bottom Layer w20: C32.2 1292.34,1248.74 D1.1 1310.37,1298.03 R10.2
NetC37_2: C37.2 R22.2 R23.1 R25.2 | length 306.6
  Top Layer w30: C37.2 3331,2839.4 3331,2845 3337.37,2851.37 R23.1 3462.37,2869 R22.2
NetCC1_1: CC1.1 CC1.2 U2.22 | length 1202.6
  Top Layer w130: 332.5,2553.5 581,2305 581,2121 868.72,1833.28 U2.22 U2.22@1129,1833.28
NetCC1_3: CC1.3 CC1.4 U1.1 U1.2
  other v3: -67,2543.15 -28,2543.15 11,2543.15 50,2543.15
NetCC2_1: CC2.1 CC2.2 U2.21 | length 871
  Top Layer w130: 322,1804 614,1804 770.94,1647.06 U2.21 U2.21@1128,1647.06
NetCC2_3: CC2.3 CC2.4 V1.1 V1.2
  other v3: -67,1793.94 -28,1793.94 11,1793.94 50,1793.94
NetCC3_1: CC3.1 CC3.2 U2.20 | length 1005.7
  Top Layer w100: 307,1059 307,1154 613.84,1460.84 U2.20
NetCC3_3: CC3.3 CC3.4 W1.1 W1.2
  other v3: -67,1044.72 -28,1044.72 11,1044.72 50,1044.72
NetD1_2: D1.2 D2.2 D3.2 R11.1 R14.2 | length 463.4
  Bottom Layer w20: D1.2 2001,1101.34 D2.2 1999.66,1030 1999.66,826.97 R14.2
NetP2_1: P2.1 R3.2 | length 997.1
  Top Layer w30: R3.2 2832.57,1260 3376,716.57 3376,695 P2.1@3436,635
NetP2_2: P2.2 R2.2 | length 889.5
  Top Layer w30: R2.2 2856,1180 3336,700 P2.2@3336,635
NetP2_3: P2.3 R1.2 | length 781.8
  Top Layer w30: R1.2 2879.43,1100 3236,743.43 P2.3@3236,635
NetP3_1: P3.1 R6.2 | length 946.3
  Top Layer w30: R6.2 2762.27,1500 3162.27,1100 3316,1100 3418.5,997.5 P3.1@3448.5,997.5
NetP3_2: P3.2 R5.2 | length 808.3
  Top Layer w30: R5.2 2785.71,1420 3150.85,1054.85 3276.15,1054.85 3332.51,998.49 P3.2@3332.51,986.92
NetP3_3: P3.3 R4.2 | length 672.7
  Top Layer w30: R4.2 2809.14,1340 3164.14,985 P3.3@3236,985
NetR17_2: R17.2 R18.2 U4.2 | length 209.3
  Top Layer w30: U4.2 v2(2991,2400)
  Bottom Layer w30: R18.2 2931.63,2356.26 R17.2 2986,2360 2991,2365 v2(2991,2400)
NetR19_1: R19.1 U4.7 | length 629.8
  Top Layer w30: U4.7 2991,1885 3006,1870 3076,1870 3156,1790 3156,1585 3251.63,1489.37 R19.1
NetR20_1: R20.1 R26.1 | length 177
  Bottom Layer w30: R20.1 R26.1
NetR20_2: R20.2 R21.1 | length 88.7
  Top Layer w30: R21.1 3465.37,3105 v2(3508,3105)
  Bottom Layer w30: R20.2 v2(3508,3105)
NetR21_2: R21.2 R22.1 | length 138.8
  Top Layer w30: R22.1 3385.63,2970 R21.2
NetR23_2: R23.2 U5.2 | length 355.3
  Top Layer w30: U5.2@3418,2443 3418,2691 3480,2753 R23.2
NetR24_1: R24.1 U5.7 | length 85.5
  Top Layer w20: R24.1 U5.7@3418,2013.87
NetR26_2: R26.2 R27.1 | length 94.2
  Top Layer w30: R27.1 v2(3509.06,3284)
  Bottom Layer w30: R26.2 3465.37,3284 v2(3509.06,3284)
NetR27_2: R27.2 R28.1 | length 208.6
  Top Layer w30: R28.1 3326.73,3376.27 3383.63,3319.37 R27.2@3383.63,3302.53
NetR28_2: R28.2 R29.1 | length 102.3
  Top Layer w30: R28.2 3217.37,3295.56 R29.1
NetR29_2: R29.2 R33.2 | length 102.7
  Top Layer w30: R33.2 3137.63,3195 R29.2
NetR30_2: R30.2 R31.1 | length 102.7
  Top Layer w30: R30.2 2956.63,3411 R31.1
NetR31_2: R31.2 R32.1 | length 109.7
  Top Layer w30: R31.2 3036.37,3306.5 R32.1
NetR32_2: R32.2 R33.1 | length 109.7
  Top Layer w30: R33.1 2960.63,3198 R32.2
NU: R7.1 R10.1 U2.19 | length 177.5
  Bottom Layer w30: U2.19 1115.95,1300 1161,1300 1201,1340 R10.1 R10.1@1241,1340
NV: R8.1 R12.1 U2.18 | length 166.6
  Bottom Layer w30: U2.18 1152.17,1150 R12.1
NW: R9.1 R13.1 U2.17 | length 155
  Bottom Layer w30: U2.17 1148.39,960 R13.1
temp: C35.2 P8.2 R19.2 | length 192.6
  Top Layer w30: R19.2 3330.37,1283.23 C35.2
V_DC: C38.2 P7.2 R24.2 | length 256
  Top Layer w30: C38.2 3327.4,1725.4 3342,1740 3342,1816 3375.63,1849.63 R24.2
Vdd1: C33.2 C34.2 R16.1 U3.4 U4.1 U5.1 | length 703.2
  Top Layer w30: U4.1 3068.4,2387.4 C33.2 3130,2392.41 U3.4
  Bottom Layer w30: R16.1 3191.41,2465 U3.4 3221.59,2484 v2(3506,2484)
Vfo: R16.2 R17.1 U2.14 | length 2498.5
  Bottom Layer w20: U2.14 2099,1139.08 2174.1,1214.19 2346.81,1214.19 2512.5,1048.5 2789.5,1048.5 2961,1220 2961,1695 2771,1885 2771,2225 2856.63,2310.63 R17.1
  Bottom Layer w30: R17.1 2861,2364.37 2861,2450 2876,2465 R16.2
pads on no net: CC1.6 CC2.6 CC3.6 P1.0 P2.0 P3.0 P4.0 P5.0 P6.0 P7.0 P8.0 P8.1 U2.24

## Polygon pours and split planes (outlines as drawn)
Gnd1 on Top Layer "Top Layer-No Net" (solid, remove dead copper, pour order 40): 2071,1600 2001,1530 2001,500 2111,390 2461,390 2641,210 2921,210 2961,270 3106,324.38 3106,1275 2851,1530 2411,1530 2341,1600
Gnd1 on Bottom Layer "Top Layer-No Net" (solid, remove dead copper, pour order 42): 2071,1600 2001,1530 2001,500 2111,390 2461,390 2641,210 2921,210 2961,270 3116,328.13 3116,1035 3071,1080 3071,1628.96 2999.96,1700 2896,1700 2866,1670 2866,1550 2846,1530 2411,1530 2341,1600

## Other copper
Top Layer:
  rectangle net 5Vdc4: 3456,1978 3515,2049
  rectangle net 5gnd4: 3310,1971 3379,2055
  region net +VDCBUS: 1191.32,1940.33 946.32,1940.33 756.65,2130 756.65,2405 496,2675 496,3055 401,3150 121.47,3150 31,3059.53 31,2809.53 6,2784.53 -344,2784.53 -369,2809.53 -369,3174.53 -313.51,3230.01 -238.51,3230.01 -148.95,3319.58 -149.06,3394.47 -88.53,3455 2581,3455 2806,3230 2806,2655 2556,2405 1981,2405 1871,2295 1871,397.51 1981,280 2361.5,280 2431,205 2431,30 2361.5,-45 1031,-45 951,35 951,198.16 1022.84,270 1552,270 1649,367 1649,823 1649,2523 1731,2605 2431,2605 2556,2730 2556,3005 2449,3112 2163,3112 974.22,3112 854,2991.78 854,2756.01 981.65,2630 1147,2630 1249,2543.56 1249,1998
  region net -VDCBUS: 1039,3030 939,2930 939,2780 1014,2705 1206,2705 1356,2555 1356,870 1259,783 815,783 771,827 771,1334.89 661.57,1334.57 489,1162 489,13 381,-95 156,-95 31,30 31,230 6,255 -344,255 -369,230 -369,-130.47 -309,-190.47 -214,-190.47 -129,-275.47 -129,-370.47 -79.47,-420 656,-420 2431,-420 2481,-370 2481,-170 2431,-120 936,-120 856,-47.27 856,255 956,355 1506,355 1577,426 1577,876 1577,2601 1681,2705 2381,2705 2456,2780 2456,2958.6 2372.59,3030
  region net NetCC3_1: 206,998 216,988 304,988 348,1032 348,1128 271,1128 206,1063
  region net NetCC2_1: 206,1749 216,1739 304,1739 373,1739 373,1853 347,1879 271,1879 206,1814
  region net NetCC3_3: -244,841.57 -234,831.58 -104,831.57 -94,841.57 -94,981.58 -84,991.58 186,991.57 196,1001.58 196,1066.57 131,1131.57 -204,1131.58 -244,1091.57
  region net NetCC2_3: -244,1590.79 -234,1580.79 -104,1580.79 -94,1590.79 -94,1730.79 -84,1740.79 186,1740.79 196,1750.79 196,1815.79 131,1880.79 -204,1880.79 -244,1840.79
  region net NetCC1_1: 206,2500 216,2490 304,2490 373,2490 373,2604 347,2630 271,2630 206,2565
  region net NetCC1_3: -244,2340 -234,2330 -104,2330 -94,2340 -94,2480 -84,2490 186,2490 196,2500 196,2565 131,2630 -204,2630 -244,2590
  region net NU: 879,1335 1163,1335 1195,1303 1195,1231 1159,1195 879,1195
  region net NW: 879,973 1163,973 1195,941 1195,869 1159,833 879,833
  region net Gnd1: 3281,2775 3346,2775 3371,2800 3426,2800 3426,2745 3373,2692 3373,2257 3316,2200 3146,2200 3096,2250 3096,2344 3205,2344 3251,2390 3251,2480 3211,2520 3211,2705
  region net Vdd1: 3456,2675 3521,2675 3526,2670 3526,2410 3516,2400 3461,2400 3451,2410 3451,2670
  region net Gnd1: 3031,2510 2951,2430 2951,2320 2916,2285 2831,2285 2831,2080 2831.3,1869.7 3071,1630 3071,1305 3011,1305 2836,1480 2836,1530 2846,1530 2866,1550 2866,1755 2771,1850 2771,2375 2983.5,2587.5 3133.5,2587.5 3213.5,2667.5 3211,2510
Bottom Layer:
  region net -VDCBUS: 1039,3030 939,2930 939,2780 1014,2705 1206,2705 1357.47,2553.53 1357.47,816.47 1324,783 814,783 771,826 771,1214.4 741.4,1244 586.59,1244 489,1146.41 489,13 381,-95 156,-95 31,30 31,230 6,255 -344,255 -369,230 -369,-130.47 -309,-190.47 -214,-190.47 -129,-275.47 -129,-370.47 -79.47,-420 656,-420 2431,-420 2481,-370 2481,-170 2431,-120 936,-120 856,-47.27 856,255 956,355 1506,355 1577,426 1577,876 1577,2601 1681,2705 2381,2705 2456,2780 2456,2958.6 2372.59,3030
  region net +VDCBUS: 1196,1945 941,1945 756.65,2135 756.65,2405 496,2675 496,3055 401,3150 121.47,3150 31,3059.53 31,2809.53 6,2784.53 -344,2784.53 -369,2809.53 -369,3174.53 -313.55,3229.98 -238.55,3229.98 -149,3319.53 -149,3394.53 -88.53,3455 2581,3455 2806,3230 2806,2655 2556,2405 1981,2405 1871,2295 1871,397.51 1981,280 2356,280 2431,205 2431,30 2361.5,-45 1031,-45 951,35 951,198.16 1022.84,270 1552,270 1649,367 1649,823 1649,2523 1731,2605 2431,2605 2556,2730 2556,3005 2449,3112 2163,3112 974.22,3112 854,2991.78 854,2756.01 981.65,2630 1147,2630 1249,2543.56 1249,1998
  region net NetCC3_3: -244,841.57 -234,831.58 -104,831.57 -94,841.57 -94,981.58 -84,991.58 76,991.57 86,1001.57 86,1091.57 76,1101.57 -204,1101.58 -244,1061.58
  region net NetCC2_3: -244,1590.79 -234,1580.79 -104,1580.79 -94,1590.79 -94,1730.79 -84,1740.79 76,1740.79 86,1750.79 86,1840.79 76,1850.79 -204,1850.79 -244,1810.79
  region net NetCC1_3: -244,2340 -234,2330 -104,2330 -94,2340 -94,2480 -84,2490 76,2490 86,2500 86,2590 76,2600 -204,2600 -244,2560
  region net NV: 878.81,1152 1162.81,1152 1194.81,1120 1194.81,1048 1158.81,1012 878.81,1012

## Silkscreen, mask and mechanical layers (free items; w line width, h text height)
Top Overlay:
  circle w78.74: c271.35,105 r120.51
  circle w78.74: c3106,105 r125
  circle w78.74: c3106,2939.65 r134.77
  circle w78.74: c271.35,2939.65 r124.82
  lines w30: 2409,1740 2409,1739 2412,1736 ; 2668,2066 2668,2065 2670,2063 ; 2668,2335 2669,2334 ; 2997,917 3000,914 ; 3524,2706 3524,2708
  text "Inverter REV4.0 / v.morais@fe.up.pt" at 3426,-105 h30 r90
  text "TOP" at 3051,-360 h60
Bottom Overlay:
  circle w78.74: c271.35,105 r131.01
  circle w78.74: c3106,105 r125
  circle w78.74: c3106,2939.65 r134.77
  circle w78.74: c271.35,2939.65 r127.65
  text "BOT" at 3191,-360 h60
Top Solder:
  rectangle: 213,998 290,1061
  rectangle: 213,1749 290,1812
  rectangle: 213,2500 290,2563
  region: -244,841.57 -234,831.58 -104,831.57 -94,841.57 -94,981.58 -84,991.58 167,991.57 179,1003.58 179,1068.58 146,1101.57 -204,1101.58 -244,1061.58
  region: -244,1590.79 -234,1580.79 -104,1580.79 -94,1590.79 -94,1730.79 -84,1740.79 167,1740.79 179,1752.79 179,1817.79 146,1850.79 -204,1850.79 -244,1810.79
  region: 1181,1950 1236,2005 1236,2530 1151,2615 971,2615 831,2755 831,3439.53 -59,3439.53 -109.02,3389.51 -108.89,3309.63 -229,3189.53 -299,3189.53 -344,3144.53 -344,2834.53 -324,2814.53 -19,2814.53 6,2839.53 6,3069.53 111.47,3175 436,3175 521,3090 521,2664.92 763.82,2412.18 763.82,2147.18 961,1950
  region: 879,1335 1163,1335 1195,1303 1195,1231 1159,1195 879,1195
  region: 879,973 1163,973 1195,941 1195,869 1159,833 879,833
  region: -244,2340 -234,2330 -104,2330 -94,2340 -94,2480 -84,2490 167,2490 179,2502 179,2567 146,2600 -204,2600 -244,2560
  region: 624.54,1288.54 773.97,1288.54 773.97,-405 -64.47,-405 -109,-360.47 -109,-251.52 -195.05,-165.47 -304,-165.47 -349,-120.47 -349,205 -324,230 -24,230 6,200 6,-45 106,-145 406,-145 546,-5 546,220 511.41,254.59 508.71,1172.71
Bottom Solder:
  region: 878.81,1152 1162.81,1152 1194.81,1120 1194.81,1048 1158.81,1012 878.81,1012